# Altium PCB AdcUnitV02.PcbDoc
Units mil, origin at the board's own origin, x right, y up, seen from the top; angles counter-clockwise.
Board outline 9448.82 x 984.25 mil, 2 copper layers (Top Layer, Bottom Layer); 57 components, 27 nets, 146 pads, 5 vias.
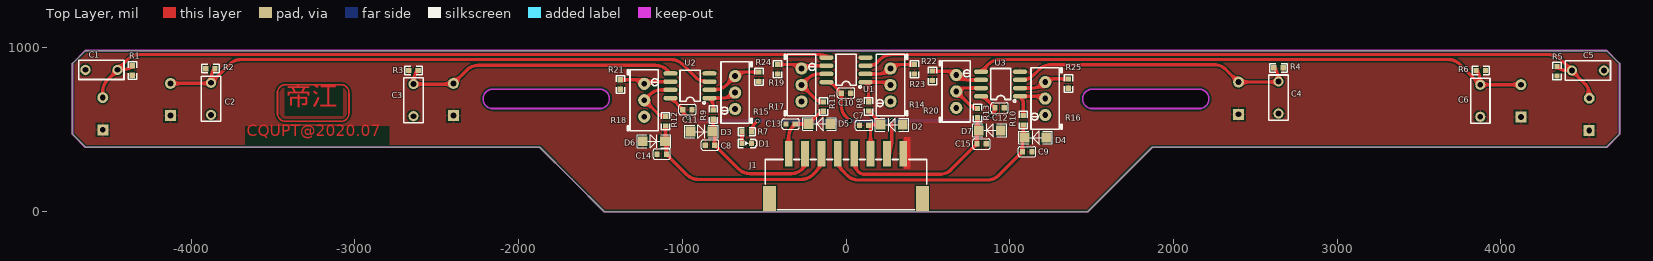
[diagram p0: Top Layer view]
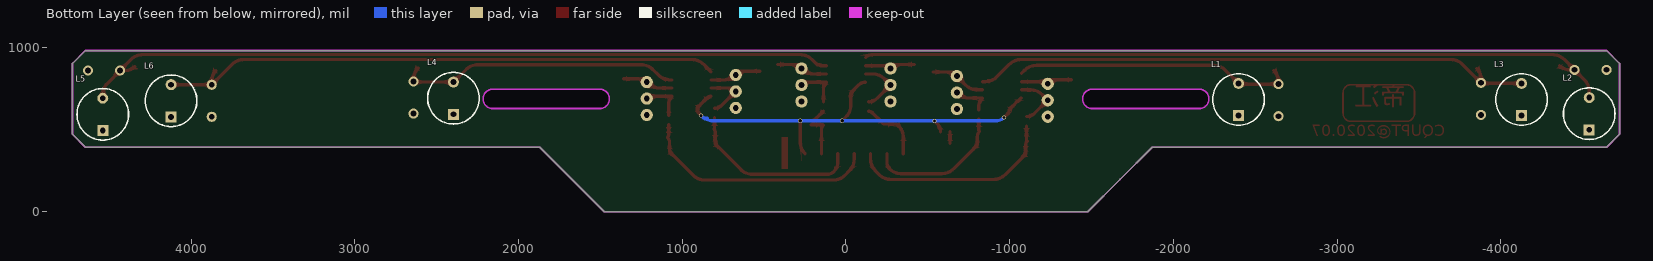
[diagram p1: Bottom Layer view, seen from below]
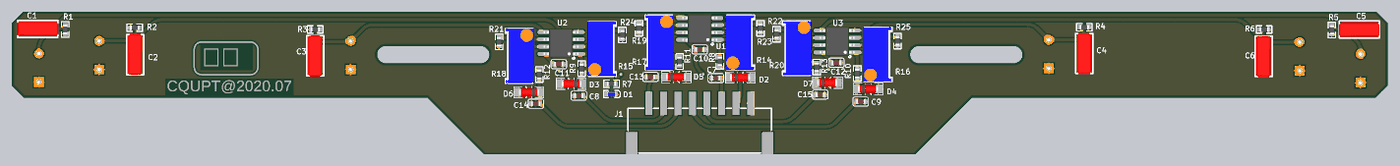
[diagram p2: 3D render of the assembled board from above, using the file's embedded part models]
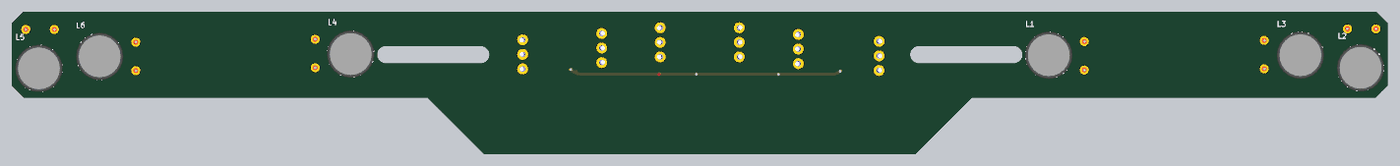
[diagram p3: 3D render of the assembled board from below, using the file's embedded part models]

## Layer stack, top to bottom
Top Solder: solder mask 0.4, Solder Resist, Dk 3.5
Top Layer: signal copper 1.4
Dielectric 1: dielectric 12.6, FR-4, Dk 4.8
Bottom Layer: signal copper 1.4
Bottom Solder: solder mask 0.4, Solder Resist, Dk 3.5

## Board outline
-4645.67,393.7 -4724.41,472.44 -4724.41,905.51 -4645.67,984.25 4645.67,984.25 4724.41,905.51 4724.41,472.44 4645.67,393.7 1870.08,393.7 1476.38,0 -1476.38,0 -1673.23,196.85 -1870.08,393.7
cut-out: 1503.94,629.92 2157.48,629.92 ccw(c2157.48,688.98) 2157.48,748.03 1503.94,748.03 ccw(c1503.94,688.98)
cut-out: -2157.48,629.92 -1503.94,629.92 ccw(c-1503.94,688.98) -1503.94,748.03 -2157.48,748.03 ccw(c-2157.48,688.98)

## Design rules (kind name [scope] priority, off if disabled: settings)
Clearance [All] p1: gap=10
PolygonConnect [All] p1: connectstyle=Relief reliefconductorwidth=10 reliefentries=4 polygonreliefangle="90 Angle" airgapwidth=10
RoutingVias [All] p1: holewidth=28 width=50 viastyle="Through Hole" minholewidth=28 minwidth=50 maxholewidth=28 maxwidth=50
SolderMaskExpansion [All] p1: expansion=4
Width [All] p1: maxlimit=3937.01 minlimit=10 preferedwidth=15
30 further rules are at their usual default settings.

## Components (designator, comment, footprint, x,y, rotation, side; value= is the part's Value field where it differs from the comment)
C1 "6.8nF" CAP3 -4547.24,866.14 r180 top
C2 "6.8nF" CAP3 -3877.95,688.98 r270 top
C3 "6.8nF" CAP3 -2641.73,681.1 r270 top
C4 "6.8nF" CAP3 2641.73,696.85 r270 top
C5 "6.8nF" CAP3 4531.5,862.2 r0 top
C6 "6.8nF" CAP3 3874.02,677.17 r270 top
C7 "22uF" CAP_0603 110.24,527.56 r180 top
C8 "22uF" CAP_0603 -830.71,406.69 r180 top
C9 "22uF" CAP_0603 1106.3,366.14 r0 top
C10 "104" CAP_0603 0,724.41 r180 top
C11 "104" CAP_0603 -968.5,623.23 r180 top
C12 "104" CAP_0603 938.19,633.86 r180 top
C13 "22uF" CAP_0603 -338.58,535.43 r180 top
C14 "22uF" CAP_0603 -1125.98,351.57 r180 top
C15 "22uF" CAP_0603 827.95,413.39 r0 top
D1 "LED" LED_0603_B -606.3,417.32 r180 top
D2 "ZMM3V3" LL34 279.53,531.5 r180 top
D3 "ZMM3V3" LL34 -882.46,489.37 r0 top
D4 "ZMM3V3" LL34 1158.05,452.76 r180 top
D5 "ZMM3V3" LL34 -161.42,535.43 r180 top
D6 "ZMM3V3" LL34 -1173.8,430.32 r0 top
D7 "ZMM3V3" LL34 877.95,496.06 r180 top
J1 "Header" XH2.54-8P 0,216.54 r0 top
L1 "10mH" Inductor_8x10 -2397.64,685.04 r90 bottom
L2 "10mH" Inductor_8x10 -4539.37,598.43 r90 bottom
L3 "10mH" Inductor_8x10 -4125.98,685.04 r90 bottom
L4 "10mH" Inductor_8x10 2397.64,692.91 r90 bottom
L5 "10mH" Inductor_8x10 4539.37,594.49 r90 bottom
L6 "10mH" Inductor_8x10 4122.05,677.17 r90 bottom
R1 "100k" RES_0603 -4358.27,862.2 r90 top
R2 "100k" RES_0603 -3881.89,874.02 r0 top
R3 "100k" RES_0603 -2641.73,862.2 r0 top
R4 "100k" RES_0603 2641.73,877.95 r180 top
R5 "100k" RES_0603 4342.52,858.27 r90 top
R6 "100k" RES_0603 3876.77,862.2 r180 top
R7 "240" RES_0603 -606.3,488.19 r0 top
R8 "100" RES_0603 137.8,642.91 r270 top
R9 "100" RES_0603 -811.02,592.91 r270 top
R10 "100" RES_0603 1082.68,559.06 r270 top
R11 "100" RES_0603 -137.8,641.73 r270 top
R12 "100" RES_0603 -1102.36,552.36 r270 top
R13 "100" RES_0603 803.15,602.36 r270 top
R14 "100k" RES_POT-3296W 271.65,773.62 r90 top
R15 "100k" RES_POT-3296W -677.17,727.56 r90 top
R16 "100k" RES_POT-3296W 1216.54,690.94 r90 top
R17 "100k" RES_POT-3296W -271.65,773.62 r270 top
R18 "100k" RES_POT-3296W -1232.28,680.31 r270 top
R19 "240" RES_0603 -417.32,870.08 r90 top
R20 "100k" RES_POT-3296W 673.23,734.25 r270 top
R21 "240" RES_0603 -1377.95,776.77 r90 top
R22 "240" RES_0603 527.56,829.53 r90 top
R23 "240" RES_0603 417.32,870.08 r90 top
R24 "240" RES_0603 -531.5,824.02 r90 top
R25 "240" RES_0603 1358.27,782.28 r90 top
U1 "LMV358IDR" SOIC-8_150MIL 0,866.14 r180 top
U2 "LMV358IDR" SOIC-8_150MIL -952.76,768.9 r180 top
U3 "LMV358IDR" SOIC-8_150MIL 943.99,779.72 r180 top

## Footprints (in the part's own frame and the unit in brackets; to place one, negate y for a bottom-side part, rotate by r counter-clockwise, add the part's x,y. Pads: shape width x height; smd on the part's side, far side on the other; paste and mask are expansions set on the pad)
CAP3 [mil]
  round 62 hole 35: 1(-97.92,0) 2(97.92,0)
  silkscreen extent -138,-59 138,59, body extent -142,-50 142,48, height 59
CAP_0603 [mm]
  rect 0.8x0.85 smd: 1(-0.73,0) 2(0.73,0)
  silkscreen extent -1.36,-0.8 1.34,0.8, body extent -0.8,-0.4 0.8,0.4, height 0.6
Inductor_8x10 [mm]
  rect 1.7x1.7 hole 0.9: 1(-2.5,0)
  round 1.7 hole 0.9: 2(2.5,0)
  silkscreen extent -4,-4 4,4, body extent -4.15,-4.15 4.15,4.15, height 11.2
LED_0603_B [mm]
  rect 0.8x0.85 smd: A(0.73,0) C(-0.73,0)
  silkscreen extent -1.55,-0.65 1.35,0.65, body extent -0.81,-0.4 0.81,0.4, height 0.6
LL34 [mil]
  rect 60x60 smd: 1(-67.5,0) 2(67.5,0)
  silkscreen extent -102,-40 102,40, body extent -66,-30 71,29, height 59
RES_0603 [mm]
  rect 0.8x0.85 smd: 1(-0.73,0) 2(0.73,0)
  silkscreen extent -1.35,-0.65 1.35,0.65, body extent -0.8,-0.4 0.8,0.4, height 0.38
RES_POT-3296W [mm] "RES-ADJ-TH_3P-L9.5-W4.9-P2.50-L_3296W"
  round 1.9 hole 0.9: 1(-2.55,0) 2(-0.01,0) 3(2.55,0)
  silkscreen extent -4.75,-2.64 4.75,2.2, body extent -4.75,-2.59 4.75,2.41, height 11.5
SOIC-8_150MIL [mm]
  oval 2.2x0.7 smd: 1(-3.023,1.905) 2(-3.023,0.635) 3(-3.023,-0.635) 4(-3.023,-1.905) 5(3.023,-1.905) 6(3.023,-0.635) 7(3.023,0.635) 8(3.023,1.905)
  silkscreen extent -2.37,-2.41 1.55,2.83, body extent -3.03,-2.57 3.03,2.57, height 1.95
XH2.54-8P [mm]
  rect 1.2x4 smd: 1(-8.9,3.5) 2(-6.35,3.5) 3(-3.81,3.5) 4(-1.27,3.5) 5(1.27,3.5) 6(3.81,3.5) 7(6.35,3.5) 8(8.89,3.5)
  rect 2x4 smd: 9(11.85,-3.5) 10(-11.85,-3.5)
  silkscreen extent -12.5,-5.2 12.5,2.6

## Part data
C1 C2 C3 C4 C5 C6: library part CAP_聚苯电容
C7 C8 C9 C10 C11 C12 C13 C14 C15: library part CAP_0603
D1: library part LED_0603, "发光LED"
J1: library part "Header 2.54_8"
L1 L2 L3 L4 L5 L6: library part Inductor
R1 R2 R3 R4 R5 R6 R7 R8 R9 R10 R11 R12 R13 R19 R21 R22 R23 R24 R25: library part RES_0603
R14 R15 R16 R17 R18 R20: library part RES_POT-3296W, "可调电阻3296W"

## Via types
v1: diameter 25, hole 20, Top Layer to Bottom Layer, tented both sides, 5 vias

## Nets (pads, with @x,y where several pads share a name; then routed paths per layer and width w, separated by ;. In a path a pad name is that pad's centre, name@x,y a point inside that pad or via, vN(x,y) a via of type N, cw(c..) or ccw(c..) an arc to the next point about the centre after c; other vN are vias at no path point)
GND: C1.2 C2.2 C3.2 C4.2 C5.2 C6.2 C7.2 C8.2 C9.2 C10.1 C11.1 C12.1 C13.2 C14.2 C15.2 D1.C D2.1 D3.1 D4.1 D5.1 D6.1 D7.1 J1.8 L1.1 L2.1 L3.1 L4.1 L5.1 L6.1 R1.1 R2.1 R3.1 R4.1 R5.1 R6.1 R19.1 R21.1 R22.1 R23.1 R24.1 R25.1 U1.4 U2.4 U3.4
LC1: C2.1 L3.2 R2.2 U2.3 | length 3488.9
  Top Layer w20: L3.2 -3886.23,783.46 ccw(c-3886.23,795.17) C2.1 ; R2.2 ccw(c-3793.27,814.14) -3877.95,814.14 C2.1 ; U2.3 -850.9,793.9 cw(c-850.9,893.9) -921.61,823.19 -998.27,899.84 ccw(c-1068.98,829.13) -1068.98,929.13 -3694.29,929.13 ccw(c-3694.29,829.13) -3765,899.84 C2.1
LC2: C3.1 L1.2 R3.2 U2.5 | length 1719.7
  Top Layer w20: R3.2 ccw(c-2543.61,792.82) -2641.73,792.82 C3.1 -2408.37,779.02 ccw(c-2408.37,794.2) L1.2 -2316.69,864.41 cw(c-2245.98,793.7) -2245.98,893.7 -1162.98,893.7 cw(c-1162.98,793.7) -1092.27,864.41 U2.5
LC3: C5.1 L5.2 R5.2 U1.3 | length 4678.2
  Top Layer w20: U1.3 144.78,891.14 ccw(c144.78,953.65) 188.98,909.45 209.49,929.96 cw(c280.2,859.25) 280.2,959.25 4295.11,959.25 cw(c4295.11,859.25) 4365.82,929.96 C5.1 ; R5.2 ccw(c4402.4,946.89) 4402.4,862.2 C5.1 ; L5.2 4539.37,714.99 ccw(c4439.37,714.99) 4510.08,785.7 C5.1
LC4: C1.1 L2.2 R1.2 U1.5 | length 4669.4
  Top Layer w20: L2.2 -4539.37,734.68 cw(c-4439.37,734.68) -4510.08,805.39 C1.1 ; R1.2 cw(c-4418.15,950.83) -4418.15,866.14 C1.1 ; U1.5 ccw(c-162.72,897.42) -162.72,959.25 -4314.8,959.25 ccw(c-4314.8,859.25) -4385.51,929.96 C1.1
LC5: C4.1 L4.2 R4.2 U3.3 | length 1740.1
  Top Layer w20: U3.3 1074.33,804.72 ccw(c1074.33,904.72) 1145.04,834.01 1179.37,868.35 cw(c1250.08,797.64) 1250.08,897.64 2249.92,897.64 cw(c2249.92,797.64) 2320.63,868.35 L4.2 2633.46,791.34 ccw(c2633.46,803.04) C4.1 2641.73,808.57 ccw(c2543.61,808.57) R4.2
LC6: C6.1 L6.2 R6.2 U3.5 | length 3477.3
  Top Layer w20: U3.5 870.11,899.84 cw(c940.82,829.13) 940.82,929.13 3678.54,929.13 cw(c3678.54,829.13) 3749.25,899.84 C6.1 ; R6.2 cw(c3785.3,799.47) 3874.02,799.47 C6.1 ; L6.2 3875.24,775.59 ccw(c3875.24,773.85) C6.1
NetD1_A: D1.A R7.1 | length 70.9
  Top Layer w20: D1.A R7.1
NetR8_1: R8.1 R14.2 U1.1 | length 282
  Top Layer w20: R8.1 137.8,745.77 ccw(c73.62,745.77) U1.1 228.4,791.14 cw(c228.4,729.97) R14.2
NetR9_1: R9.1 R15.2 U2.1 | length 244.4
  Top Layer w20: R9.1 -811.02,639.02 ccw(c-888.64,639.02) U2.1 -751.85,693.9 ccw(c-751.85,793.9) -681.14,723.19 R15.2
NetR10_1: R10.1 R16.2 U3.1 | length 279.5
  Top Layer w20: R10.1 1082.68,657.2 ccw(c1015.47,657.2) U3.1 1182.31,704.72 cw(c1182.31,656.33) R16.2
NetR11_1: R11.1 R17.2 U1.7 | length 349.8
  Top Layer w20: R11.1 cw(c-137.8,743.66) -189.55,691.91 R17.2 -233.82,811.85 cw(c-163.11,741.14) -163.11,841.14 U1.7
NetR12_1: R12.1 R18.2 U2.7 | length 350.4
  Top Layer w20: R12.1 cw(c-1102.36,654.29) -1154.11,602.54 R18.2 -1198.38,714.61 cw(c-1127.67,643.9) -1127.67,743.9 U2.7
NetR13_1: R13.1 R20.2 U3.7 | length 327.2
  Top Layer w20: R13.1 cw(c803.15,694.78) 758.12,649.75 R20.2 cw(c721.7,686.18) 721.7,754.72 U3.7
NetR14_3: R14.3 R23.2 U1.2 | length 314.3
  Top Layer w20: U1.2 197.36,841.14 ccw(c197.36,941.14) 268.07,870.43 R14.3 cw(c331.53,814.14) 331.53,898.82 R23.2
NetR15_3: R15.3 R24.2 U2.2 | length 339.4
  Top Layer w20: U2.2 -802.64,743.9 ccw(c-802.64,843.9) -731.93,773.19 R15.3 cw(c-617.29,768.07) -617.29,852.76 R24.2
NetR16_3: R16.3 R25.2 U3.2 | length 311.4
  Top Layer w20: U3.2 1138.5,754.72 ccw(c1138.5,854.72) 1209.21,784.01 R16.3 cw(c1264.06,743.81) 1264.06,811.02 R25.2
NetR17_1: R17.1 R19.2 U1.6 | length 309.5
  Top Layer w20: R19.2 -331.53,898.82 cw(c-331.53,814.14) R17.1 cw(c-230.31,832.67) -230.31,891.14 U1.6
NetR18_1: R18.1 R21.2 U2.6 | length 316.4
  Top Layer w20: R21.2 -1292.16,805.51 cw(c-1292.16,720.83) R18.1 cw(c-1200.44,748.87) -1200.44,793.9 U2.6
NetR20_1: R20.1 R22.2 U3.6 | length 311.8
  Top Layer w20: R22.2 616.21,858.27 cw(c616.21,777.63) R20.1 673.86,834.01 ccw(c744.57,904.72) 744.57,804.72 U3.6
OUT1: C8.1 D3.2 J1.2 R9.2 | length 870.8
  Top Layer w20: R9.2 -811.02,498.87 cw(c-824.47,498.87) D3.2 cw(c-846.33,458) -801.97,458 C8.1 -656.85,261.57 ccw(c-586.14,332.28) -586.14,232.28 -334.25,232.28 ccw(c-334.25,326.38) -267.72,259.84 ccw(c-310.48,302.6) -250.01,302.6 J1.2
OUT2: C14.1 D6.2 J1.3 R12.2 | length 1283.2
  Top Layer w20: R12.2 -1102.36,439.82 cw(c-1115.8,439.82) D6.2 cw(c-1128.16,408.45) -1097.24,408.45 C14.1 -971.81,226.14 ccw(c-901.1,296.85) -901.1,196.85 -273.7,196.85 ccw(c-273.7,296.85) -202.99,226.14 -179.29,249.84 ccw(c-250.01,320.55) -150.01,320.55 J1.3
OUT3: C7.1 D2.2 J1.6 R8.2 | length 369.3
  Top Layer w20: R8.2 192.61,559.36 cw(c164.75,531.5) D2.2@204.15,531.5 ; J1.6 149.99,500.96 ccw(c112.38,500.96) C7.1 cw(c148.48,518.05) 148.48,531.5 D2.2@204.15,531.5 ; D2.2@194.65,535.43 cw(c194.65,521.99) D2.2@204.15,531.5 ; D2.2 D2.2@204.15,531.5
OUT4: C13.1 D5.2 J1.1 R11.2 | length 396.4
  Top Layer w20: J1.1 -350.4,453.46 cw(c-250.4,453.46) -321.11,524.17 C13.1 D5.2 -160.95,603.4 cw(c-137.8,580.25) R11.2
OUT5: C9.1 D4.2 J1.4 R10.2 | length 1467.5
  Top Layer w20: J1.4 -50.01,319.77 ccw(c49.99,319.77) -20.72,249.06 6.14,222.2 ccw(c76.85,292.91) 76.85,192.91 862.91,192.91 ccw(c862.91,292.91) 933.62,222.2 C9.1 1077.56,421.39 cw(c1121.92,421.39) D4.2 cw(c1109.56,471.77) 1082.68,471.77 R10.2
OUT6: C15.1 D7.2 J1.5 R13.2 | length 1080.1
  Top Layer w20: J1.5 49.99,303.99 ccw(c134.7,303.99) 74.8,244.09 ccw(c112.82,282.11) 112.82,228.35 572.75,228.35 ccw(c572.75,328.35) 643.46,257.64 C15.1 799.21,487.7 cw(c820.87,487.7) 805.56,503.01 cw(c828.08,513.69) 803.15,513.69 R13.2
VCC: C10.2 C11.2 C12.2 J1.7 R7.2 U1.8 U2.8 U3.8 | length 2825.6
  Top Layer w20: U2.8 cw(c-1071.76,684.62) U2.8@-1065.2,691.19 ; U2.8@-1065.2,691.18 C11.2 ccw(c-959.23,623.23) -986.11,596.34 v1(-964.57,574.8) ; R7.2 cw(c-508.17,488.19) -557.24,537.25 v1(-541,553.49) ; U1.8 cw(c-119,734.34) -78.84,774.51 C10.2 -28.74,648.9 ccw(c71.26,648.9) 0.55,578.19 v1(23.62,555.12) ; J1.7 250.24,354.57 ccw(c179.53,425.28) 279.53,425.28 v1(279.53,555.12) ; U3.8 cw(c824.99,671.91) 848.19,695.11 C12.2 cw(c852.42,633.86) 892.75,593.53 v1(885.83,586.61)
  Bottom Layer w20: v1(-964.57,574.8) ccw(c-917.04,622.33) -917.04,555.12 v1(23.62,555.12) v1(279.53,555.12) 812.91,555.12 ccw(c812.91,655.12) 883.62,584.41 v1(885.83,586.61) cw(c847.81,624.63) 847.81,570.87
pads on no net: J1.9 J1.10 R14.1 R15.1 R16.1 R17.3 R18.3 R20.3
copper on no net: | length 1872.5
  Top Layer w10: -3472.44,708.66 -3472.44,602.36 ccw(c-3421.26,602.36) -3421.26,551.18 -3094.49,551.18 ; -3405.51,775.59 -3102.36,775.59 -3085.43,775.59 cw(c-3085.43,725.59) -3035.43,725.59 -3035.43,601.18 cw(c-3085.43,601.18) -3085.43,551.18 -3422.44,551.18 cw(c-3422.44,601.18) -3472.44,601.18 -3472.44,725.59 cw(c-3422.44,725.59) -3422.44,775.59 -3381.89,775.59 ; -3035.43,610.24 -3035.43,708.66

## Polygon pours and split planes (outlines as drawn)
GND on Top Layer "Top Layer-No Net" (solid, pour order 0): -4645.67,984.25 -4724.41,905.51 -4724.41,472.44 -4645.67,393.7 -1870.08,393.7 -1476.38,0 1476.38,0 1870.08,393.7 4645.67,393.7 4724.41,472.44 4724.41,905.51 4645.67,984.25

## Keep-outs
Keep-Out Layer:
  lines w10: -1673.23,196.85 -1476.38,0 1476.38,0 1870.08,393.7 4645.67,393.7 4724.41,472.44 4724.41,905.51 4645.67,984.25 -4645.67,984.25 -4724.41,905.51 -4724.41,472.44 -4645.67,393.7 -1870.08,393.7 -1673.23,196.85 ; -1673.23,196.85 -1673.23,196.85 ; -2157.48,629.92 cw(c-2157.48,688.98) -2157.48,748.03 -1503.94,748.03 cw(c-1503.94,688.98) -1503.94,629.92 -2157.48,629.92 ; 1503.94,629.92 cw(c1503.94,688.98) 1503.94,748.03 2157.48,748.03 cw(c2157.48,688.98) 2157.48,629.92 1503.94,629.92

## Other copper
Top Layer:
  rectangle net GND: 354.33,259.84 393.7,456.69
  text "帝江" at -3421.26,610.24 h200
  text "CQUPT@2020.07" at -3661.42,437.01 h120

## Silkscreen, mask and mechanical layers (free items; w line width, h text height)
Top Overlay:
  text "String" at -1062.99,1271.65 h60
  text "String" at -944.88,-763.78 h60
Top Paste:
  lines w10: -3472.44,601.18 ccw(c-3422.44,601.18) -3422.44,551.18 -3085.43,551.18 ccw(c-3085.43,601.18) -3035.43,601.18 -3035.43,725.59 ccw(c-3085.43,725.59) -3085.43,775.59 -3389.76,775.59 -3422.44,775.59 ccw(c-3422.44,725.59) -3472.44,725.59 -3472.44,601.18
  text "帝江" at -3421.26,610.24 h200
  text "CQUPT@2020.07" at -3661.42,437.01 h120
Top Solder:
  lines w10: -3472.44,601.18 ccw(c-3422.44,601.18) -3422.44,551.18 -3085.43,551.18 ccw(c-3085.43,601.18) -3035.43,601.18 -3035.43,725.59 ccw(c-3085.43,725.59) -3085.43,775.59 -3303.15,775.59 -3422.44,775.59 ccw(c-3422.44,725.59) -3472.44,725.59 -3472.44,601.18
  text "帝江" at -3421.26,610.24 h200
  text "CQUPT@2020.07" at -3661.42,437.01 h120